# Altium PCB PCB_weed_robot_car_2022-03-16.pcbdoc
Units mil, origin at the board's own origin, x right, y up, seen from the top; angles counter-clockwise.
Board outline 6700 x 6710 mil, 2 copper layers (Top Layer, Bottom Layer); 43 components, 111 nets, 217 pads, 18 vias.
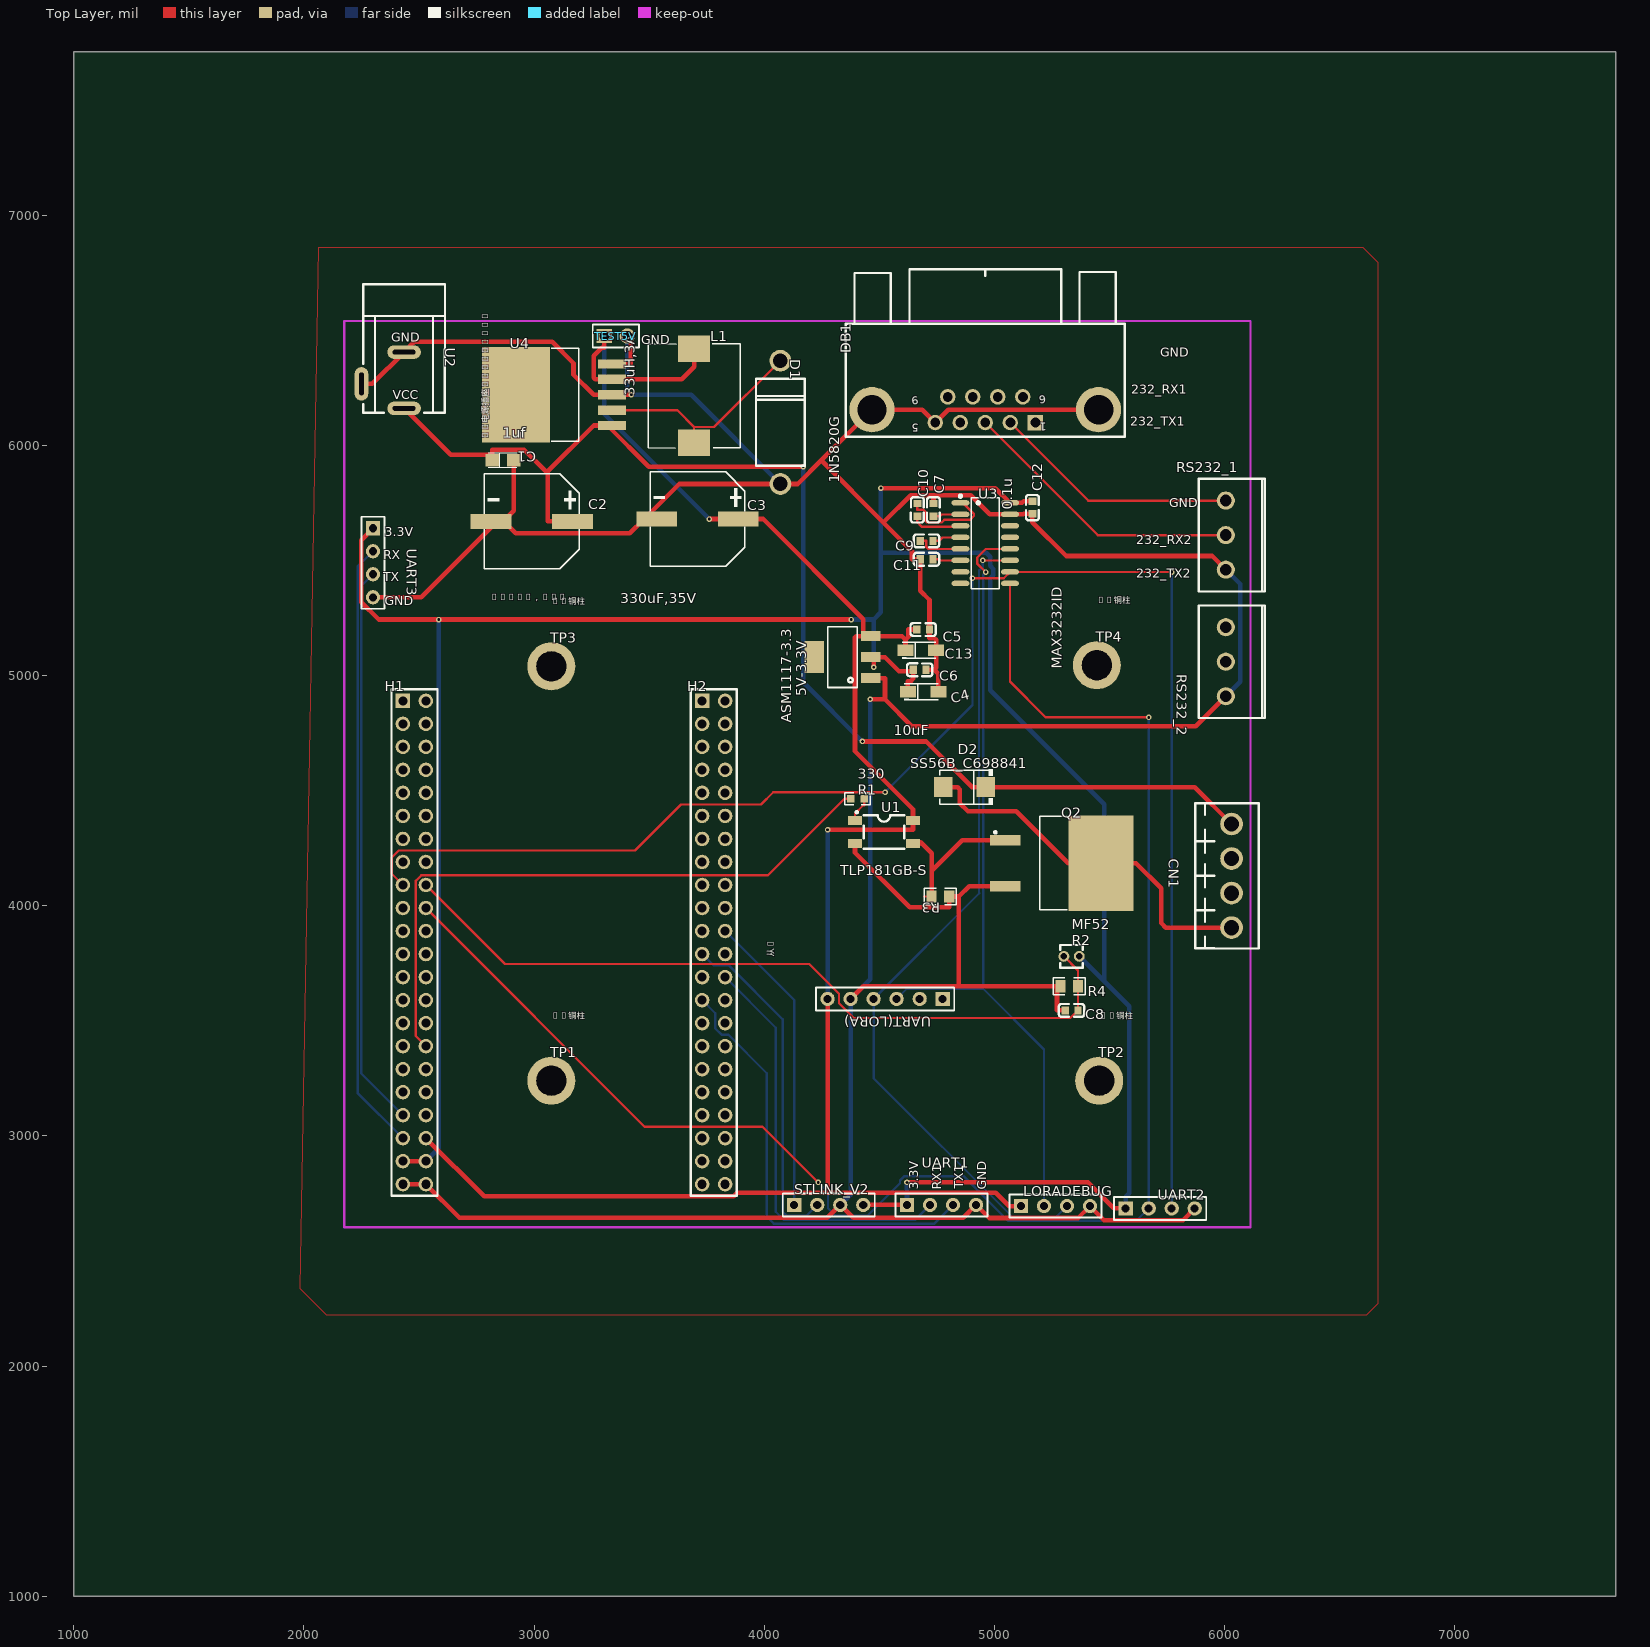
[diagram p0: Top Layer view]
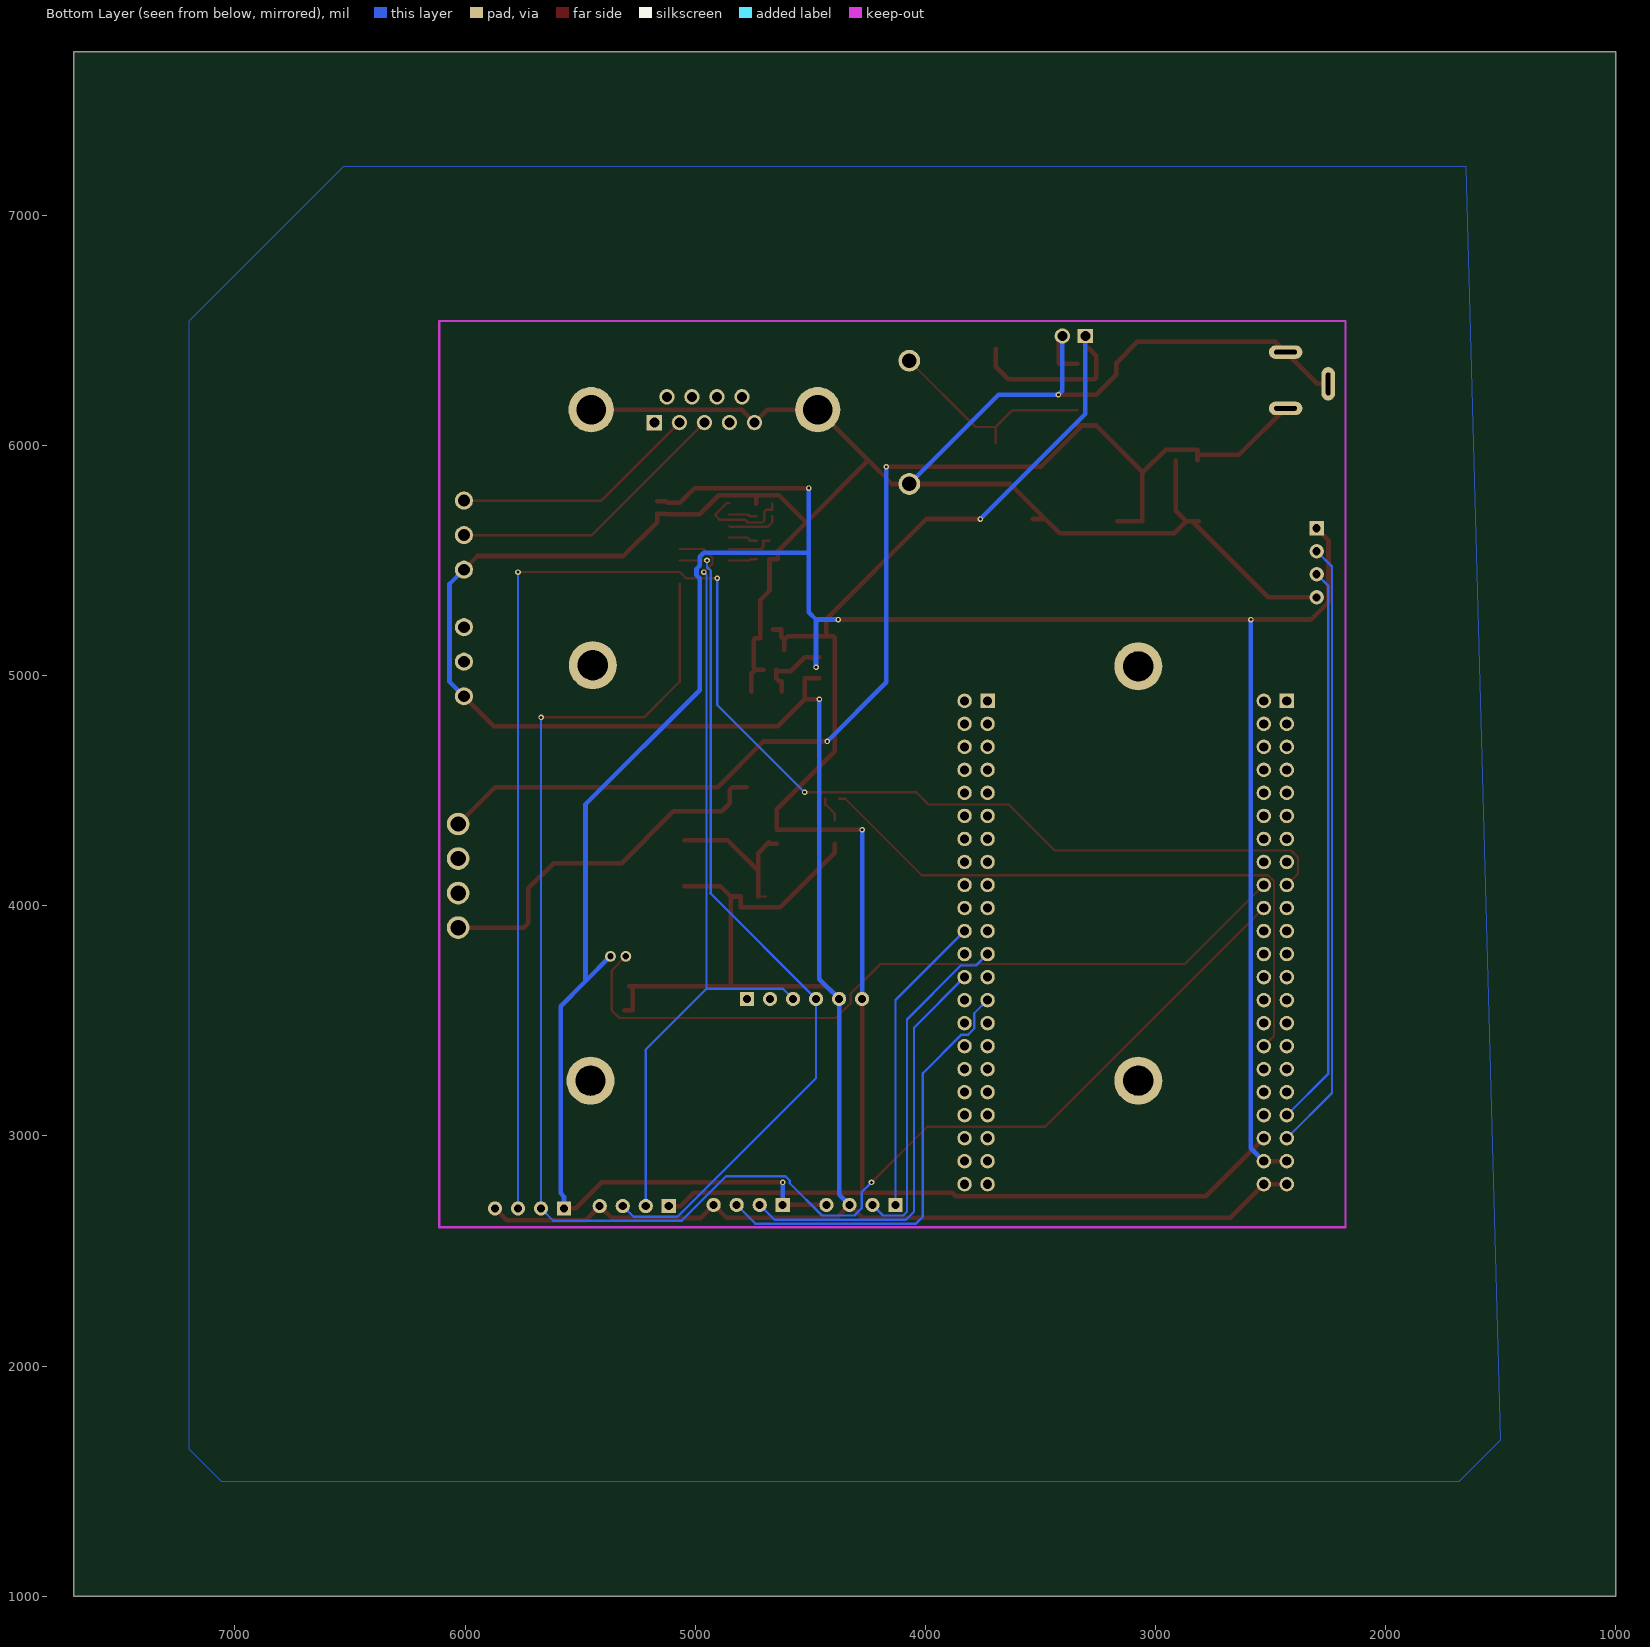
[diagram p1: Bottom Layer view, seen from below]

## Layer stack, top to bottom
Top Layer: signal copper (thickness not stored)
Dielectric: dielectric 12.6, FR-4, Dk 4.8
Bottom Layer: signal copper (thickness not stored)

## Board outline
7700,1000 1000,1000 1000,7710 7700,7710

## Components (designator, comment, footprint, x,y, rotation, side; value= is the part's Value field where it differs from the comment)
5V-3.3V "ASM1117-3.3" ASM1117-5.0-SOT223 4344.76,5080 r90 top
C1 "1uf" CASE-A_3216 2865,5935 r0 top
C2 "470uF，35V" CAP-SMD_BD10.0-L10.3-W10.3-FD 2990,5670 r180 top
C3 "330uF,35V" CAP-SMD_BD10.0-L10.3-W10.3-LS11.0-FD 3710,5680 r180 top
C4 "10uF" CAP-SMD_L3.2-W1.6-R-RD 4690,4930 r180 top
C5 "0.1uF" C0603 4690,5200 r180 top
C6 "0.1uF" C0603 4675,5025 r180 top
C7 "0.1u" C0603 4735,5720 r90 top
C8 "0.1u" C0603 5335,3545 r0 top
C9 "0.1u" C0603 4705,5585 r0 top
C10 "0.1u" C0603 4665,5720 r90 top
C11 "0.1u" C0603 4705,5505 r0 top
C12 "0.1u" C0603 5165,5730 r90 top
C13 "10uF" CAP-SMD_L3.2-W1.6-R-RD 4680,5110 r180 top
CN1 "Motor" CONN-TH_4P-P3.81_DB2EVC-3.81-4P 6030,4130 r270 top
D1 "1N5820G" DO-201AD_BD5.3-L8.4-P12.50-D1.4-RD 4070,6100 r270 top
D2 "SS56B_C698841" SMB_L4.6-W3.6-LS5.3-RD 4870,4515 r180 top
DB1 "DB9_Male" DSUB-TH_DMR-9P 4960,6155 r90 top
H1 "X5521FV-2X22C70D30-1000" HDR-TH_44P-P2.54-V-F-R2-C22-S2.54 2480,3840 r270 top
H2 "从5" HDR-TH_44P-P2.54-V-F-R2-C22-S2.54 3780,3840 r270 top
L1 "33uH,3A" IND-SMD_L11.5-W10.0_SMMS1040 3695,6215 r90 top
LORADEBUG "HDR-M-2.54_1x4" HDR-M-2.54_1X4 5265,2695 r0 top
Q2 "IRFS3607TRLPBF" TO-263-2_L10.0-W9.1-P5.08-LS15.2-TL 5255,4185 r0 top
R1 "330" R0603 4405,4465 r0 top
R2 "MF52" RES-TH_L2.5-W2.5-P1.70-D0.3 5335,3780 r0 top
R3 "4.7k" R0805 4765,4040 r180 top
R4 "10K" R0805 5325,3650 r0 top
RS232_1 "XY2500V-E-3.81-3P" CONN-TH_XY2500V-E-3.81-3P 6005,5610 r270 top
RS232_2 "XY2500V-E-3.81-3P" CONN-TH_XY2500V-E-3.81-3P 6005,5060 r270 top
STLINK_V2 "HDR-M-2.54_1x4" HDR-M-2.54_1X4 4280,2700 r0 top
TEST5V "HDR-M-2.54_1x2" HDR-M-2.54_1X2 3355,6475 r0 top
TP1 "M3铜柱" M3铜柱 3075,3240 r0 top
TP2 "M3铜柱" M3铜柱 5455,3240 r0 top
TP3 "M3铜柱" M3铜柱 3075,5040 r0 top
TP4 "M3铜柱" M3铜柱 5445,5045 r0 top
U1 "TLP181GB-S" SOP-4_L3.7-W4.6-P2.54-LS7.0-TL 4520,4320 r0 top
U2 "DC电源插座DC5.5-2.1" DC电源插座5.5-2.1 2435,6405 r270 top
U3 "MAX3232ID" SOIC-16_L9.9-W3.9-P1.27-LS6.0-BL 4960,5575 r270 top
U4 "LM2596S-5.0" TO-263-5_L10.2-W8.9-P1.70-BR 3130,6220 r0 top
UART1 "HDR-M-2.54_1x4" HDR-M-2.54_1X4 4770,2700 r0 top
UART2 "HDR-M-2.54_1x4" HDR-M-2.54_1X4 5720,2685 r0 top
UART3 "HDR-M-2.54_1x4" HDR-M-2.54_1X4 2300,5490 r270 top
UART(LORA) "HDR-F-2.54_1x6" HDR-F-2.54_1X6 4575,3595 r180 top

## Footprints (in the part's own frame and the unit in brackets; to place one, negate y for a bottom-side part, rotate by r counter-clockwise, add the part's x,y. Pads: shape width x height; smd on the part's side, far side on the other; paste and mask are expansions set on the pad)
ASM1117-5.0-SOT223 [mil]
  rect 43x85 smd: 1(-91,-117) 2(0,-117) 3(91,-117)
  rect 138x85 smd: 4(0,127)
  silkscreen extent -132,-59 132,69
C0603 [mm]
  rect 0.8x0.9 smd: 1(-0.7,0) 2(0.7,0)
  silkscreen extent -1.41,-0.71 1.39,0.72
CAP-SMD_BD10.0-L10.3-W10.3-FD [mm]
  rect 4.5x1.65 smd: 1(-4.5,0) 2(4.5,0)
  silkscreen extent -5.23,-5.23 5.23,5.23
CAP-SMD_BD10.0-L10.3-W10.3-LS11.0-FD [mm]
  rect 4.5x1.65 smd: 1(-4.5,0) 2(4.5,0)
  silkscreen extent -5.23,-5.23 5.23,5.23
CAP-SMD_L3.2-W1.6-R-RD [mil]
  rect 69.19x51.02 smd: 1(66.39,0) 2(-66.39,0)
  silkscreen extent -66,-37 81,37
CASE-A_3216 [mil]
  rect 59.05x53.5 smd: 1(-47.24,0) 2(47.25,0)
  silkscreen extent -65,-30 61,33
CONN-TH_4P-P3.81_DB2EVC-3.81-4P [mm]
  round 2.5 hole 1.7: 1(-5.715,0) 2(-1.905,0) 3(1.905,0) 4(5.715,0)
  silkscreen extent -8.02,-4 8.02,3
CONN-TH_XY2500V-E-3.81-3P [mm]
  round 2 hole 1.3: 1(-3.81,0) 2(0,0) 3(3.81,0)
  silkscreen extent -6.21,-3 6.21,4.3
DC电源插座5.5-2.1 [mm]
  oval 1.5x3.7 hole 0.5 slot 2.5 at 90 deg: 1(6.2,0) 2(0,0)
  oval 3.7x1.5 hole 0.5 slot 2.5 at 0 deg: 3(3.5,-4.7)
  silkscreen extent -7.5,-4.51 6.7,4.51
DO-201AD_BD5.3-L8.4-P12.50-D1.4-RD [mm]
  round 2.4 hole 1.6: 1(-6.8,0) 2(6.8,0)
  silkscreen extent -4.8,-2.7 4.8,2.7
DSUB-TH_DMR-9P [mm]
  rect 1.7x1.7 hole 1.1: 1(-1.42,-5.52)
  round 1.7 hole 1.1: 2(-1.42,-2.76) 3(-1.42,0) 4(-1.42,2.76) 5(-1.42,5.52) 6(1.42,-4.14) 7(1.42,-1.38) 8(1.42,1.38) 9(1.42,4.14)
  round 5 hole 3.25: 10(0,12.5) 11(0,-12.5)
  silkscreen extent -3,-15.4 15.5,15.4
HDR-F-2.54_1X6 [mil]
  rect 62x62 hole 35: 1(-200,0)
  round 62 hole 35: 2(-100,0) 3(0,0) 4(100,0) 5(200,0) 6(300,0)
  silkscreen extent -250,-50 350,50
HDR-M-2.54_1X2 [mm]
  rect 1.7x1.575 hole 1.1: 1(-1.27,0)
  round 1.7 hole 1.1: 2(1.27,0)
  silkscreen extent -2.54,-1.27 2.54,1.27
HDR-M-2.54_1X4 [mil]
  rect 62x62 hole 35: 1(-150,0)
  round 62 hole 35: 2(-50,0) 3(50,0) 4(150,0)
  silkscreen extent -200,-50 200,50
HDR-TH_44P-P2.54-V-F-R2-C22-S2.54 [mm]
  rect 1.6x1.6 hole 1: 1(-26.67,-1.27)
  round 1.6 hole 1: 2(-26.67,1.27) 3(-24.13,-1.27) 4(-24.13,1.27) 5(-21.59,-1.27) 6(-21.59,1.27) 7(-19.05,-1.27) 8(-19.05,1.27) 9(-16.51,-1.27) 10(-16.51,1.27) 11(-13.97,-1.27) 12(-13.97,1.27) 13(-11.43,-1.27) 14(-11.43,1.27) 15(-8.89,-1.27) 16(-8.89,1.27) 17(-6.35,-1.27) 18(-6.35,1.27) 19(-3.81,-1.27) 20(-3.81,1.27) 21(-1.27,-1.27) 22(-1.27,1.27) 23(1.27,-1.27) 24(1.27,1.27) 25(3.81,-1.27) 26(3.81,1.27) 27(6.35,-1.27) 28(6.35,1.27) 29(8.89,-1.27) 30(8.89,1.27) 31(11.43,-1.27) 32(11.43,1.27) 33(13.97,-1.27) 34(13.97,1.27) 35(16.51,-1.27) 36(16.51,1.27) 37(19.05,-1.27) 38(19.05,1.27) 39(21.59,-1.27) 40(21.59,1.27) 41(24.13,-1.27) 42(24.13,1.27) 43(26.67,-1.27) 44(26.67,1.27)
  silkscreen extent -27.94,-2.54 27.94,2.54
IND-SMD_L11.5-W10.0_SMMS1040 [mm]
  rect 2.924x3.5 smd: 1(5.18,0) 2(-5.18,0)
  silkscreen extent -5.75,-5.08 5.74,5.08
M3铜柱 [mil]
  round 208.66 hole 129.92 slot 130.12 at 0 deg: 1(0,0)
R0603 [mil]
  rect 31.75x34.02 smd: 1(-29.65,0) 2(29.65,0)
  silkscreen extent -55,-26 55,26
R0805 [mil]
  rect 44.59x54.21 smd: 1(-38.04,0) 2(38.04,0)
  silkscreen extent -69,-36 69,36
RES-TH_L2.5-W2.5-P1.70-D0.3 [mil]
  round 47.24 hole 27.56: 1(-33.47,0) 2(33.46,0)
  silkscreen extent -49,-49 49,49
SMB_L4.6-W3.6-LS5.3-RD [mil]
  rect 80.61x86.31 smd: 1(-92.94,0) 2(92.94,0)
  silkscreen extent -123,-77 108,77
SOIC-16_L9.9-W3.9-P1.27-LS6.0-BL [mil]
  oval 23.7x77.6 smd: 1(-175,-107.7) 2(-125,-107.7) 3(-75,-107.7) 4(-25,-107.7) 5(25,-107.7) 6(75,-107.7) 7(125,-107.7) 8(175,-107.7) 9(175,107.7) 10(125,107.7) 11(75,107.7) 12(25,107.7) 13(-25,107.7) 14(-75,107.7) 15(-125,107.7) 16(-175,107.7)
  silkscreen extent -211,-114 198,60
SOP-4_L3.7-W4.6-P2.54-LS7.0-TL [mm]
  rect 1.5x1.001 smd: 1(-3.2,1.27) 3(-3.2,-1.27) 4(3.2,-1.27) 6(3.2,1.27)
  silkscreen extent -3.12,-1.85 2.25,2.32
TO-263-2_L10.0-W9.1-P5.08-LS15.2-TL [mil]
  rect 132.23x44.65 smd: 1(-208.1,100) 3(-208.1,-100)
  rect 282.7x416 smd: 4(208.1,0)
  silkscreen extent -256,-203 61,203
TO-263-5_L10.2-W8.9-P1.70-BR [mm]
  rect 3.083x1.02 smd: 1(5.31,-3.4) 2(5.31,-1.7) 3(5.31,0) 4(5.31,1.7) 5(5.31,3.4)
  rect 7.521x10.566 smd: 6(-5.31,0)
  silkscreen extent -1.4,-5.16 1.65,5.16

## Via types
v1: diameter 24, hole 12, Top Layer to Bottom Layer, tented both sides, 11 vias
v2: diameter 24.02, hole 12.01, Top Layer to Bottom Layer, tented both sides, 7 vias

## Nets (pads, with @x,y where several pads share a name; then routed paths per layer and width w, separated by ;. In a path a pad name is that pad's centre, name@x,y a point inside that pad or via, vN(x,y) a via of type N, cw(c..) or ccw(c..) an arc to the next point about the centre after c; other vN are vias at no path point)
+3.3V: 5V-3.3V.2 C4.1 C6.2 C12.2 H1.41 H1.42 R2.2 STLINK_V2.4 U3.16 UART1.1 UART2.1 UART3.1 | length 11949
  Top Layer w20: UART3.1 2248.58,5588.58 2248.58,5319.02 2324.22,5243.38 v1(2585.98,5243.38) v1(4378.23,5243.38) ; H1.41 H1.42 ; STLINK_V2.4 UART1.1 ; 5V-3.3V.2 5V-3.3V.2@4493.02,5080 ; v1(4475.16,5035.89) 4475.16,5062.14 5V-3.3V.2@4493.02,5080 ; v1(4506.83,5814.38) 5003.32,5814.38 U3.16 5119.71,5750 5127.27,5757.56 C12.2 ; v1(4620,2797.73) 5406.26,2797.73 5518.99,2685 UART2.1 ; C4.1 4623.61,4946.25 4623.61,4975.52 4635.69,4975.52 4647.44,4987.27 4647.44,5014.5 C6.2@4647.44,5019.02 ; C6.2 C6.2@4647.44,5019.02 ; 5V-3.3V.2@4493.02,5080 4524.27,5080 4585.25,5019.02 C6.2@4647.44,5019.02
  Bottom Layer w20: H1.42 2585.98,2945.98 v1(2585.98,5243.38) ; v1(4378.23,5243.38) 4475.16,5243.38 ; v1(4475.16,5035.89) 4475.16,5243.38 ; v1(4506.83,5814.38) 4506.83,5534.21 ; UART1.1 v1(4620,2797.73) ; R2.2 5476.75,3671.72 ; UART2.1 5570,2736.01 5585.03,2751.04 5585.03,3563.44 5476.75,3671.72 ; 4475.16,5243.38 4506.83,5275.05 4506.83,5534.21 ; 4506.83,5534.21 4963.56,5534.21 4980.95,5516.82 4980.95,5476.13 4994.42,5462.66 4994.42,5436.12 4980.95,5422.65 4980.95,4936.84 5476.75,4441.04 5476.75,3671.72
+5V: 5V-3.3V.3 C3.1 C5.2 C13.1 H1.40 L1.1 LORADEBUG.1 TEST5V.1 U1.6 U4.4 UART(LORA).6 | length 8621.8
  Top Layer w20: H1.40 2782.79,2737.21 3867.71,2737.21 3883.15,2752.65 4275,2752.65 ; TEST5V.1 3305,6423.99 3293.33,6423.99 3258.36,6389.02 3258.36,6294.44 3265.87,6286.93 3339.05,6286.93 3640.55,6286.93 3695,6341.38 L1.1 ; v1(3761.21,5680) 3778.58,5680 C3.1 3995.76,5680 4430.51,5245.25 5V-3.3V.3@4430.51,5171 ; 4275,3595 4275,2752.65 ; v1(4275,4330.29) 4645.98,4330.29 4645.98,4350.15 U1.6 4645.98,4409.71 4645.98,4419.17 4394.26,4670.89 4394.26,5166.01 4399.25,5171 5V-3.3V.3@4430.51,5171 ; C13.1 4613.61,5155.52 ; C5.2 4626.68,5200 4626.68,5168.59 4613.61,5155.52 ; LORADEBUG.1 5063.99,2695 5006.34,2752.65 4275,2752.65 ; 5V-3.3V.3@4430.51,5171 5V-3.3V.3 4598.13,5171 4613.61,5155.52
  Bottom Layer w20: TEST5V.1 3305,6136.21 v1(3761.21,5680) ; 4275,3595 v1(4275,4330.29)
+24V: C1.1 C2.1 CN1.1 D2.1 U2.1 U4.1 | length 5459.8
  Top Layer w20: U2.1 2637.51,5958.38 C1.1@2817.76,5958.38 ; C1.1 C1.1@2817.76,5958.38 ; C2.1 3058.57,5670 3058.57,5879.15 3054.97,5882.75 ; U4.1@3339.05,6086.14 U4.1@3318.88,6086.14 ; v1(4169.62,5907.29) 3497.73,5907.29 U4.1@3318.88,6086.14 ; v1(4426.27,4713.64) 4703.99,4713.64 4902.63,4515 D2.1 5870,4515 CN1.1 ; C1.1@2817.76,5958.38 2817.76,5981.76 2955.96,5981.76 3054.97,5882.75 ; 3054.97,5882.75 3258.36,6086.14 U4.1@3318.88,6086.14
  Bottom Layer w20: v1(4169.62,5907.29) 4169.62,4970.29 v1(4426.27,4713.64)
GND: 5V-3.3V.1 C1.2 C2.2 C3.2 C4.2 C5.1 C6.1 C7.2 C8.1 C11.1 C12.1 C13.2 D1.2 DB1.5 DB1.10 DB1.11 H1.43 H1.44 LORADEBUG.4 Q2.3 R3.1 R4.1 RS232_1.3 RS232_2.3 STLINK_V2.3 TEST5V.2 U1.3 U2.2 U2.3 U3.15 U4.3 U4.5 UART1.4 UART2.4 UART3.4 UART(LORA).5 | length 20253.9
  Top Layer w20: U2.3@2249.95,6267.22 2297.22,6267.22 U2.2 2479.67,6449.67 3078.78,6449.67 3171.02,6357.43 3171.02,6307.34 3258.36,6220 3325.32,6220 3339.05,6220 v1(3422.32,6220) ; UART3.4 2509.99,5340 C2.2@2839.99,5670 ; H1.43 H1.44 2675.75,2644.25 4274.25,2644.25 STLINK_V2.3 4385.75,2644.25 4864.25,2644.25 UART1.4 4976.88,2643.12 5363.12,2643.12 LORADEBUG.4 5476.02,2633.98 5818.98,2633.98 UART2.4 ; C2.2 C2.2@2839.99,5670 ; C1.2 2912.25,5715.11 C2.2@2867.14,5670 ; U4.5@3339.05,6353.86 3419.75,6353.86 3419.75,6460.25 TEST5V.2 ; C3.2 C3.2@3478.55,5680 ; 4375,3595 4430,3650 4845.35,3650 ; U1.3 4394.02,4230.29 4631.43,3992.88 4803.04,3992.88 R3.1 4845.35,4040 ; v1(4460.62,4896.94) 4524.27,4896.94 ; 5V-3.3V.1 4524.27,4989 4524.27,4896.94 ; C6.1 4738.32,5025 ; C7.2 4735,5783.32 ; C4.2 4756.39,5006.93 4738.32,5025 ; Q2.3 4890.35,4085 4845.35,4040 ; R4.1 R4.1@5271.68,3650 ; C8.1 5271.68,3545 R4.1@5271.68,3650 ; DB1.11 4798.59,6154.99 DB1.5 4686.79,6154.99 DB1.10 4247.67,5934.78 ; RS232_2.3 5874.77,4779.77 4641.44,4779.77 4524.27,4896.94 ; RS232_1.3 5945.87,5519.13 5312.55,5519.13 5165,5666.68 C12.1 5127.27,5702.44 5124.83,5700 U3.15 4980.32,5700 4897,5783.32 4735,5783.32 ; C2.2@2839.99,5670 C2.2@2867.14,5670 ; C2.2@2867.14,5670 2919.64,5617.5 3416.05,5617.5 C3.2@3478.55,5680 ; C3.2@3478.55,5680 3630.83,5832.28 D1.2 4145.17,5832.28 4247.67,5934.78 ; 4247.67,5934.78 4517.59,5664.86 ; 4517.59,5664.86 4636.05,5783.32 4735,5783.32 ; 4517.59,5664.86 4641.68,5540.76 4641.68,5505 C11.1 4677.44,5368.27 4717.56,5328.15 C5.1 4717.56,5162.27 4739.64,5162.27 4746.39,5155.52 C13.2 4746.39,5033.07 4738.32,5025 ; 4845.35,3650 4845.35,4040 ; 4845.35,3650 R4.1@5271.68,3650
  Bottom Layer w20: TEST5V.2 3405,6237.32 v1(3422.32,6220) 3682.28,6220 D1.2 ; STLINK_V2.3 4375,2745 4375,3595 4460.62,3680.62 v1(4460.62,4896.94) ; RS232_2.3 6067.48,4972.48 6067.48,5397.52 RS232_1.3
L1_2: D1.1 L1.2 U4.2 | length 949.3
  Top Layer w10: U4.2@3339.05,6153.07 3621.61,6153.07 3695,6079.68 ; L1.2 3695,6079.68 ; D1.1 3781.96,6079.68 3695,6079.68
LORA_RX: LORADEBUG.2 U3.12 UART(LORA).3 | length 3499.8
  Top Layer w10: v2(4962.41,5449.39) 4924.63,5487.17 4924.63,5512.04 4962.59,5550 U3.12
  Bottom Layer w10: 4575,3595 4619.05,3639.05 4951.19,3639.05 ; v2(4962.41,5449.39) 4951.19,5438.17 4951.19,3639.05 ; LORADEBUG.2 5215,3375.24 4951.19,3639.05
LORA_TX: LORADEBUG.3 U3.11 UART(LORA).4 | length 3676.7
  Top Layer w10: v2(4948.85,5500) U3.11
  Bottom Layer w10: v2(4948.85,5500) 4948.85,5468.46 4945.87,5465.48 4942.18,5465.48 4932.76,5456.06 4932.76,4055.49 4934.13,4054.13 4475,3595 4475,3250.65 5077.44,2648.21 5268.21,2648.21 LORADEBUG.3
NRST: H1.9
PA0: H1.15
PA1(DAC): C8.2 H1.18 R2.1 R4.2 | length 3370.7
  Top Layer w10: H1.18 2873.16,3746.84 4195.66,3746.84 4325,3617.5 4325,3576.01 4389.13,3511.88 5329.44,3511.88 C8.2 5362.56,3611.34 5363.04,3611.82 5363.04,3630.91 R4.2 5363.04,3718.5 R2.1
PA2(TX2): H1.17 U3.10 UART2.3 | length 7129.3
  Top Layer w10: H1.17 2381.19,4138.81 2381.19,4209.14 2412.05,4240 3438.05,4240 3638.05,4440 3986.29,4440 4039.37,4493.08 v2(4524.93,4493.08) ; v2(4904.41,5422.93) 5040.63,5422.93 U3.10 5068.2,5449.5 v2(5770,5449.5)
  Bottom Layer w10: v2(4524.93,4493.08) 4904.41,4872.56 v2(4904.41,5422.93) ; UART2.3 v2(5770,5449.5)
PA3(RX2): H1.20 U3.9 UART2.2 | length 7140.7
  Top Layer w10: H1.20 3480,3040 3991.97,3040 v2(4234.24,2797.73) ; U3.9 5067.7,4973.66 5223.16,4818.2 v2(5670,4818.2)
  Bottom Layer w10: v2(4234.24,2797.73) 4277.21,2754.76 4277.21,2685.2 4308.44,2653.97 4449.4,2653.97 4589.34,2793.91 4589.34,2805.66 4608.94,2825.26 4865.33,2825.26 5059.21,2631.38 5616.38,2631.38 UART2.2 v2(5670,4818.2)
PA4: H1.19
PA5: H1.22
PA6: H1.21
PA7: H1.24
PA8: H2.28
PA9(TX1): H2.27 UART1.3 | length 1929.7
  Bottom Layer w10: H2.27 3787.4,3532.6 3787.4,3466.5 3813.9,3440 3843.3,3440 4011,3272.3 4011,2649 4041.1,2618.9 4738.9,2618.9 UART1.3
PA10(RX1): H2.26 UART1.2 | length 1822.5
  Bottom Layer w10: H2.26 4050,3470 4050,2670 4085,2635 4655,2635 UART1.2
PA11: H2.25
PA12: H2.24
PA13(SWDIO): H2.23 STLINK_V2.2 | length 1479.4
  Bottom Layer w10: H2.23 3780,3740 3846.2,3740 4080,3506.2 4080,2670 4096,2654 4184,2654 STLINK_V2.2
PA14(SWCLK): H2.22 STLINK_V2.1 | length 1314.3
  Bottom Layer w10: H2.22 4130,3590 STLINK_V2.1
PA15: H2.21
PB0: H1.25
PB1: H1.28
PB2: H1.27
PB3: H2.9
PB4: H2.8
PB5: H2.7
PB6: H2.6
PB7: H2.5
PB8: H2.4
PB9: H2.3
PB10(TX3): H1.37 UART3.3 | length 2445.8
  Bottom Layer w10: UART3.3 2249.32,5389.32 2249.32,3270.68 H1.37
PB11(RX3): H1.39 UART3.2 | length 2659.2
  Bottom Layer w10: UART3.2 2233.23,5473.23 2233.23,3186.77 H1.39
PB12: H2.44
PB13: H2.43
PB14: H2.42
PB15: H2.41
PC0: H1.12
PC1: H1.11
PC2: H1.14
PC3: H1.13
PC4: H1.23
PC5: H1.26
PC6: H2.32
PC7: H2.31
PC8: H2.30
PC9: H2.29
PC10: H2.20
PC11: H2.19
PC12: H2.18
PC13: H1.8
PC14: H1.7
PC15: H1.10
PD0: H2.17
PD1: H2.16
PD2: H2.15
PD3: H2.14
PD4: H2.13
PD5: H2.12
PD6: H2.11
PD7: H2.10
PD8: H2.40
PD9: H2.39
PD10: H2.38
PD11: H2.37
PD12: H2.36
PD13: H2.35
PD14: H2.34
PD15: H2.33
PE0: H2.2
PE1: H2.1
PE2: H1.2
PE3: H1.1
PE4: H1.4
PE5: H1.3
PE6: H1.6
PE7: H1.30
PE8: H1.29
PE9(MOTOR_CONTROL): H1.32 R1.1 | length 2774.1
  Top Layer w10: H1.32 2485.5,3434.5 2485.5,4107.84 2510.24,4132.58 4015.98,4132.58 4348.4,4465 R1.1
PE10: H1.31
PE11: H1.34
PE12: H1.33
PE13: H1.36
PE14: H1.35
PE15: H1.38
Q2_4: CN1.4 D2.2 Q2.4 | length 1832.4
  Top Layer w10: D2.2 4828.43,4515 ; Q2.4 5615.52,4185
  Top Layer w20: D2.2 4840,4515 4850,4505 4850,4445 4885,4410 5095,4410 5320,4185 Q2.4 5615,4185 5725,4075 5725,3925 5745,3905 CN1.4
RS232_RX1: U3.14
RS232_RX2: U3.7
RS232_TX1: U3.13
RS232_TX2: U3.8
RX232_RX1: DB1.2 RS232_1.1 | length 1076.8
  Top Layer w10: DB1.2 5407.76,5760 RS232_1.1
RX232_RX2: RS232_2.1
RX232_TX1: DB1.3 RS232_1.2 | length 1247.6
  Top Layer w10: DB1.3 5449.1,5610 RS232_1.2
RX232_TX2: RS232_2.2
TP1_1: TP1.1
TP2_1: TP2.1
TP3_1: TP3.1
TP4_1: TP4.1
U1_1: R1.2 U1.1 | length 114.5
  Top Layer w10: U1.1 4394.02,4400.77 4430.17,4436.92 4434.66,4436.92 R1.2
U1_4: Q2.1 R3.2 U1.4 | length 739.6
  Top Layer w10: U1.4 4686.58,4270 ; 4693.59,4040 R3.2
  Top Layer w20: U1.4 4675,4270 4680,4275 4726.96,4228.04 4726.96,4151.96 ; R3.2 4726.96,4151.96 ; Q2.1 4860,4285 4726.96,4151.96
U3_1: C10.2 U3.1 | length 417.5
  Top Layer w10: C10.2 4665,5720.74 4691.82,5720.74 4699.73,5712.83 4699.73,5672.57 4706.99,5665.31 4770.59,5665.31 4781.62,5676.34 4893.14,5676.34 4910.88,5694.08 4910.88,5701.89 4862.77,5750 U3.1
U3_2: C7.1 U3.2 | length 120.4
  Top Layer w10: C7.1 4763.79,5692.44 4771.35,5700 U3.2
U3_3: C10.1 U3.3 | length 223
  Top Layer w10: C10.1 4665,5665.62 4683.55,5647.07 4849.37,5647.07 U3.3
U3_4: C9.2 U3.4 | length 126
  Top Layer w10: C9.2 4759.38,5585 4774.38,5600 U3.4
U3_5: C9.1 U3.5 | length 205.1
  Top Layer w10: C9.1 4704.26,5585 4704.26,5558.18 4712.44,5550 U3.5
U3_6: C11.2 U3.6 | length 121.8
  Top Layer w10: C11.2 4759.38,5505 4764.38,5500 U3.6
VB: H1.5
VR+: H1.16
pads on no net: 5V-3.3V.4 CN1.2 CN1.3 DB1.1 DB1.4 DB1.6 DB1.7 DB1.8 DB1.9 U4.6 UART(LORA).1 UART(LORA).2

## Polygon pours and split planes (outlines as drawn)
GND on Top Layer (solid): 2065,6860 6600,6860 6665,6795 6665,2270 6615,2220 2100,2220 1985,2335
GND on Bottom Layer (solid): 1650,7210 6530,7210 7200,6540 7200,1640 7060,1500 1680,1500 1500,1680

## Silkscreen, mask and mechanical layers (free items; w line width, h text height)
Top Overlay:
  text "GND" at 3465,6440.31 h39.37
  text "GND" at 5720,6385.31 h39.37
  text "232_RX1" at 5595,6225.31 h39.37
  text "232_TX1" at 5590,6085.31 h39.37
  text "GND" at 5760,5730.31 h39.37
  text "3.3V" at 2350,5605.31 h39.37
  text "232_RX2" at 5615,5570.31 h39.37
  text "RX" at 2345,5505.31 h39.37
  text "232_TX2" at 5615,5425.31 h39.37
  text "TX" at 2345,5410.31 h39.37
  text "GND" at 2350,5305.31 h39.37
  text "TX1" at 4864.69,2770 h39.37 r90
  text "3.3V" at 4669.69,2765 h39.37 r90
  text "RX1" at 4769.69,2765 h39.37 r90
  text "GND" at 4964.69,2765 h39.37 r90

## Text inside footprints (layer, text, board x,y; h text height)
DB1: Top Overlay "5" at 4670.69,6094.59 h35 r180; Top Overlay "1" at 5227.69,6098.59 h35 r180; Top Overlay "6" at 5222.16,6218.52 h35 r185; Top Overlay "9" at 4668.16,6212.52 h35 r185
U2: Top Overlay "GND" at 2380,6450.31 h39.37; Top Overlay "VCC" at 2385,6200.31 h39.37